# Altium PCB PCB1.PcbDoc
Units mm, origin at the board's own origin, x right, y up, seen from the top; angles counter-clockwise.
Board outline 152.4 x 101.6 mm, 2 copper layers (Top Layer, Bottom Layer); 8 components, 4 nets, 15 pads, 18 vias.
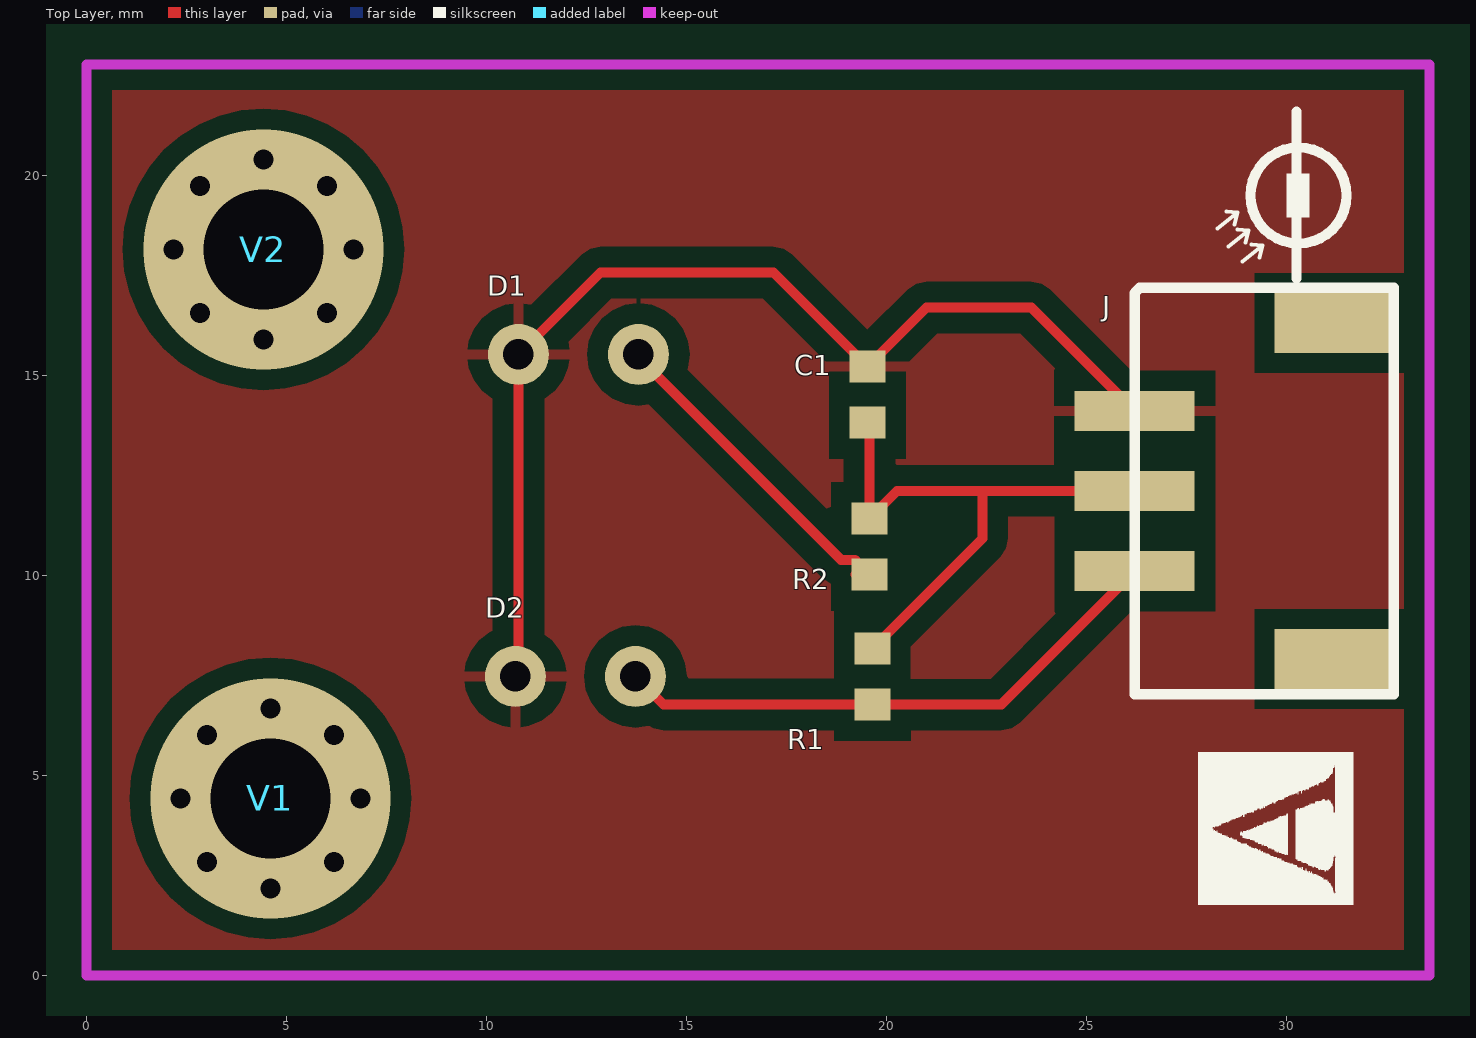
[diagram p0: Top Layer view]
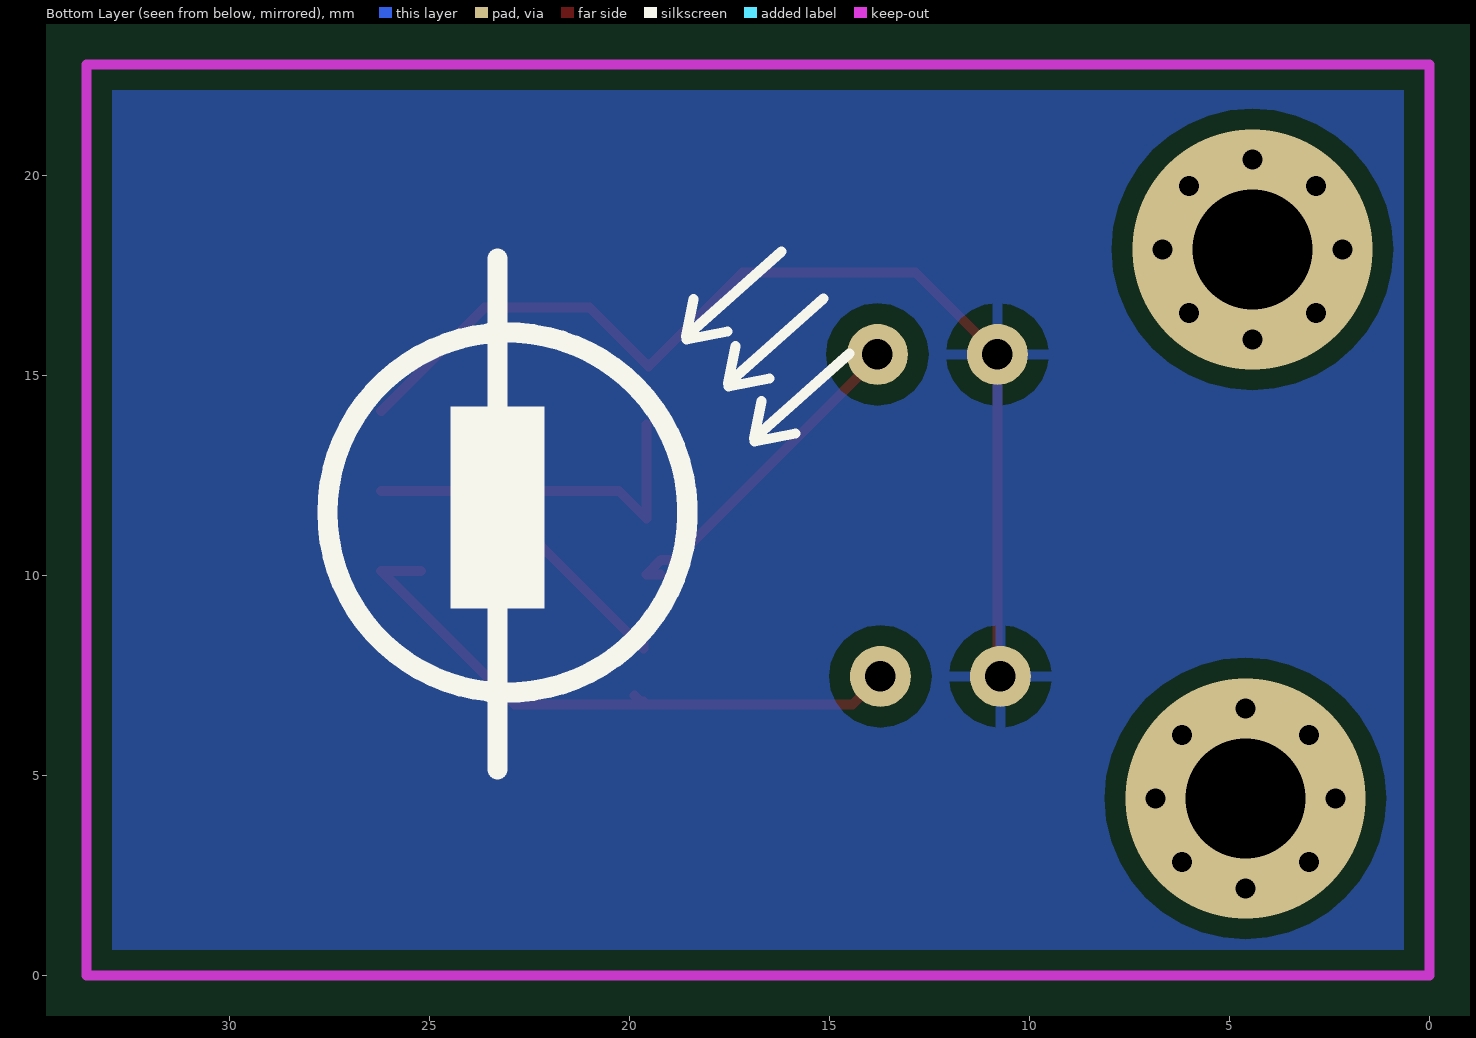
[diagram p1: Bottom Layer view, seen from below]

## Layer stack, top to bottom
Top Layer: signal copper 0.0356
Dielectric: dielectric 0.32, FR-4, Dk 4.8
Bottom Layer: signal copper 0.0356

## Board outline
-101.075,-17.275 51.325,-17.275 51.325,84.325 -101.075,84.325

## Design rules (kind name [scope] priority, off if disabled: settings)
Clearance polygon [All] p1: gap=0.508
Clearance Clearance_1 [All] p2: gap=0.254
PolygonConnect [All] p1: connectstyle=Relief reliefconductorwidth=0.254 reliefentries=4 polygonreliefangle="90 Angle"
RoutingVias [All] p1: holewidth=0.711 width=1.27 viastyle="Through Hole" minholewidth=0.711 minwidth=1.27 maxholewidth=0.711 maxwidth=1.27
SilkscreenOverComponentPads [All] p1: minsilkscreentomaskgap=0.254
SolderMaskExpansion [All] p1: expansion=0.102
Width [All] p1: maxlimit=0.254 minlimit=0.025 preferedwidth=0.254
27 further rules are at their usual default settings.

## Components (designator, comment, footprint, x,y, rotation, side; value= is the part's Value field where it differs from the comment)
C1 "100nF" 1608[0603] 19.525,14.525 r90 top
D1 "LED1" LED 12.3,15.525 r180 top
D2 "Photo Sen" Q 12.225,7.475 r180 top
J "sh-2.0" sh-2.0 26.207,12.112 r90 top
R1 "Res3" 1608[0603] 19.65,7.475 r90 top
R2 "Res3" 1608[0603] 19.575,10.725 r90 top
V1 "Via" VIA 4.6,4.425 r0 top
V2 "Via" VIA 4.425,18.15 r0 top

## Footprints (in the part's own frame and the unit in brackets; to place one, negate y for a bottom-side part, rotate by r counter-clockwise, add the part's x,y. Pads: shape width x height; smd on the part's side, far side on the other; paste and mask are expansions set on the pad)
1608[0603] [mm] "Chip Capacitor, Body 1.6x0.8mm, IPC High Density"
  rect 0.8x0.9 smd: 1(-0.7,0) 2(0.7,0)
  body extent -0.87,-0.48 0.87,0.48, height 1.3
LED [mil]
  round 60 hole 30: 1(-59.06,0) 2(59.06,0)
Q [mil]
  round 60 hole 30: 1(-59.06,0) 2(59.06,0)
sh-2.0 [mm]
  rect 1x3 smd: 1(-2,0) 2(0,0) 3(2,0)
  rect 1.5x3 smd: GND(-4.2,-5) GND(4.2,-5)
  silkscreen extent -5.08,-6.48 5.08,0
VIA [mm]

## Part data
C1: library part CAP
D1: "Typical RED GaAs LED"
D2: "Photosensitive Diode"
R1 R2: "Resistor"

## Via types
v1: diameter 1, hole 0.5, Top Layer to Bottom Layer, 16 vias
v2: diameter 6, hole 3, Top Layer to Bottom Layer, 2 vias

## Nets (pads, with @x,y where several pads share a name; then routed paths per layer and width w, separated by ;. In a path a pad name is that pad's centre, name@x,y a point inside that pad or via, vN(x,y) a via of type N, cw(c..) or ccw(c..) an arc to the next point about the centre after c; other vN are vias at no path point)
GND: C1.2 D1.2 D2.2 J.3 | length 27.3
  Top Layer w0.254: D2.2 10.8,7.55 D1.2 ; D1.2@11.125,15.525 D1.2 ; J.3 23.619,16.7 21,16.7 C1.2 17.175,17.575 12.85,17.575 D1.2
NetD1_1: D1.1 R2.1 | length 8.4
  Top Layer w0.254: D1.1 13.8,15.452 18.862,10.39 19.21,10.39 R2.1 R2.1@19.227,10.025
NetD2_1: D2.1 J.1 R1.1 | length 15.5
  Top Layer w0.254: D2.1 14.425,6.775 R1.1 ; R1.1@19.65,6.85 R1.1 ; R1.1@19.875,7 R1.1 ; J.1@25.212,10.112 J.1 22.87,6.775 R1.1
VCC: C1.1 J.2 R1.2 R2.2 | length 14.5
  Top Layer w0.254: C1.1@19.575,13.775 R2.2 20.262,12.112 22.4,12.112 ; R1.2@19.65,8.352 R1.2 22.4,10.925 22.4,12.112 ; J.2 22.4,12.112
pads on no net: J.GND
copper on no net:
  other v1: 4.6,2.175 3.009,2.834 6.191,2.834 2.35,4.425 6.85,4.425 3.009,6.016 6.191,6.016 4.6,6.675 4.425,15.9 2.834,16.559 6.016,16.559 2.175,18.15 6.675,18.15 2.834,19.741 6.016,19.741 4.425,20.4
  other v2: 4.6,4.425 4.425,18.15

## Polygon pours and split planes (outlines as drawn)
GND on Top Layer "Top Layer-No Net" (solid, pour order 4): 0,22.775 33.575,22.775 33.575,0 0,0
GND on Bottom Layer "Top Layer-No Net" (solid, pour order 6): 0,22.775 33.575,22.775 33.575,0 0,0

## Keep-outs
Keep-Out Layer:
  lines w0.254: 0,0 0,22.775 33.575,22.775 33.575,0 0,0

## Silkscreen, mask and mechanical layers (free items; w line width, h text height)
Top Overlay:
  drawing of 1217 lines, arcs and shapes, not listed
Bottom Overlay:
  circle w0.508: c23.05,11.574 r4.501
  region: 24.475,9.175 24.475,14.225 22.125,14.225 22.125,9.175
  lines w0.254: 14.5,15.55 16.888,13.425 16.698,14.36 ; 15.15,16.925 17.538,14.8 17.348,15.735 ; 15.85,13.55 16.873,13.35 ; 16.2,18.1 18.588,15.975 18.398,16.91 ; 16.5,14.925 17.523,14.725 ; 17.55,16.1 18.573,15.9
  lines w0.508: 23.3,5.15 23.3,17.925
Top Solder:
  circle w0.5: c15.75,20.225 r0.25
  text "Analog Grayscale" at 9.125,4.05 h1
  text "Sensor" at 9.1,1.95 h1